# Altium PCB PCB2.PcbDoc
Units mm, origin at the board's own origin, x right, y up, seen from the top; angles counter-clockwise.
Board outline 69.72 x 73.53 mm, 2 copper layers (Top Layer, Bottom Layer); 25 components, 26 nets, 96 pads, 11 vias.
Unrouted connection lines stored in the file: 2.
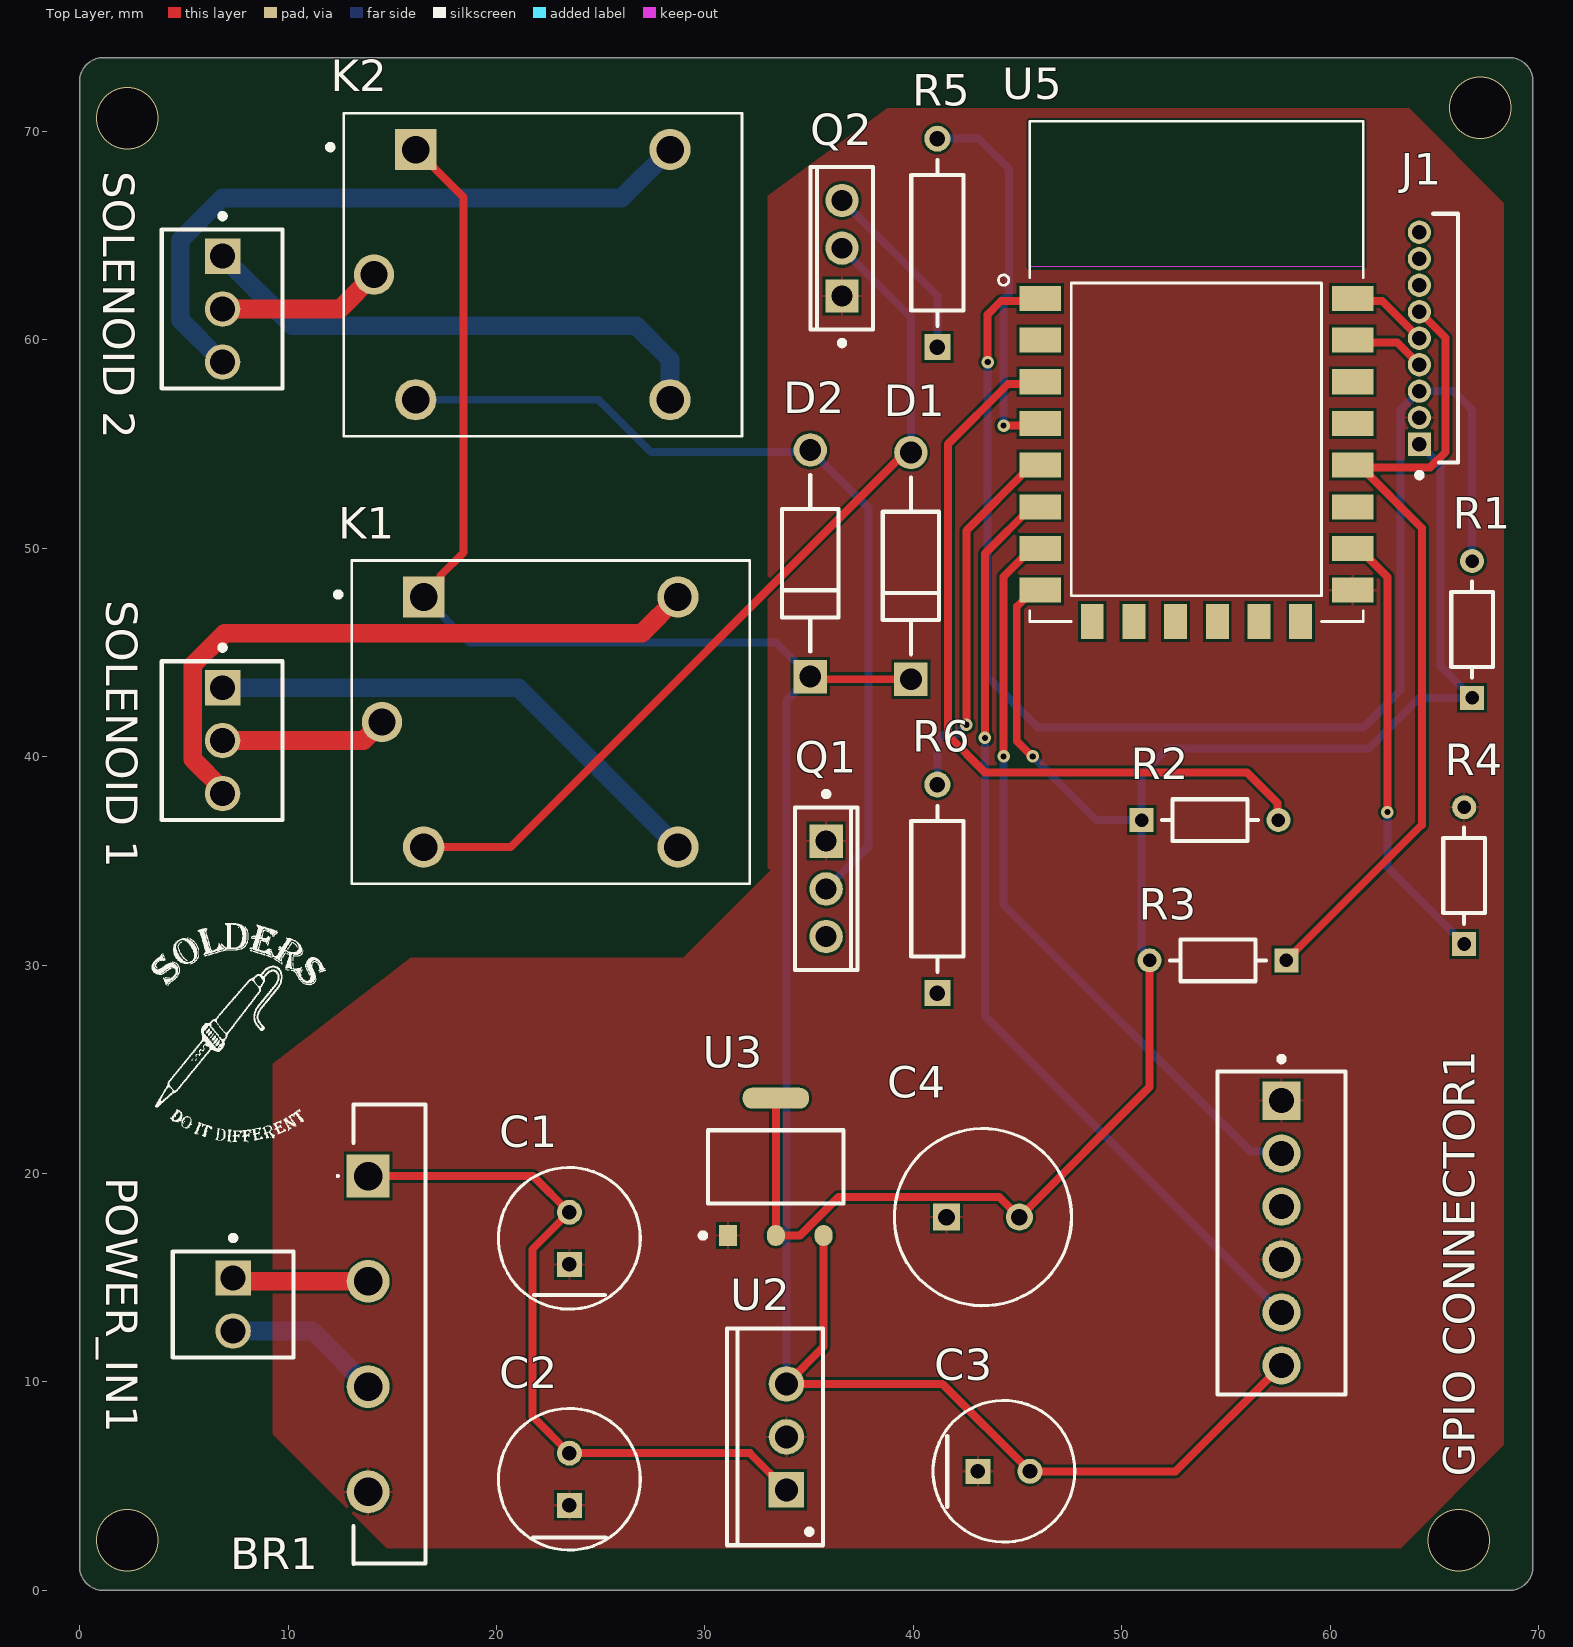
[diagram p0: Top Layer view]
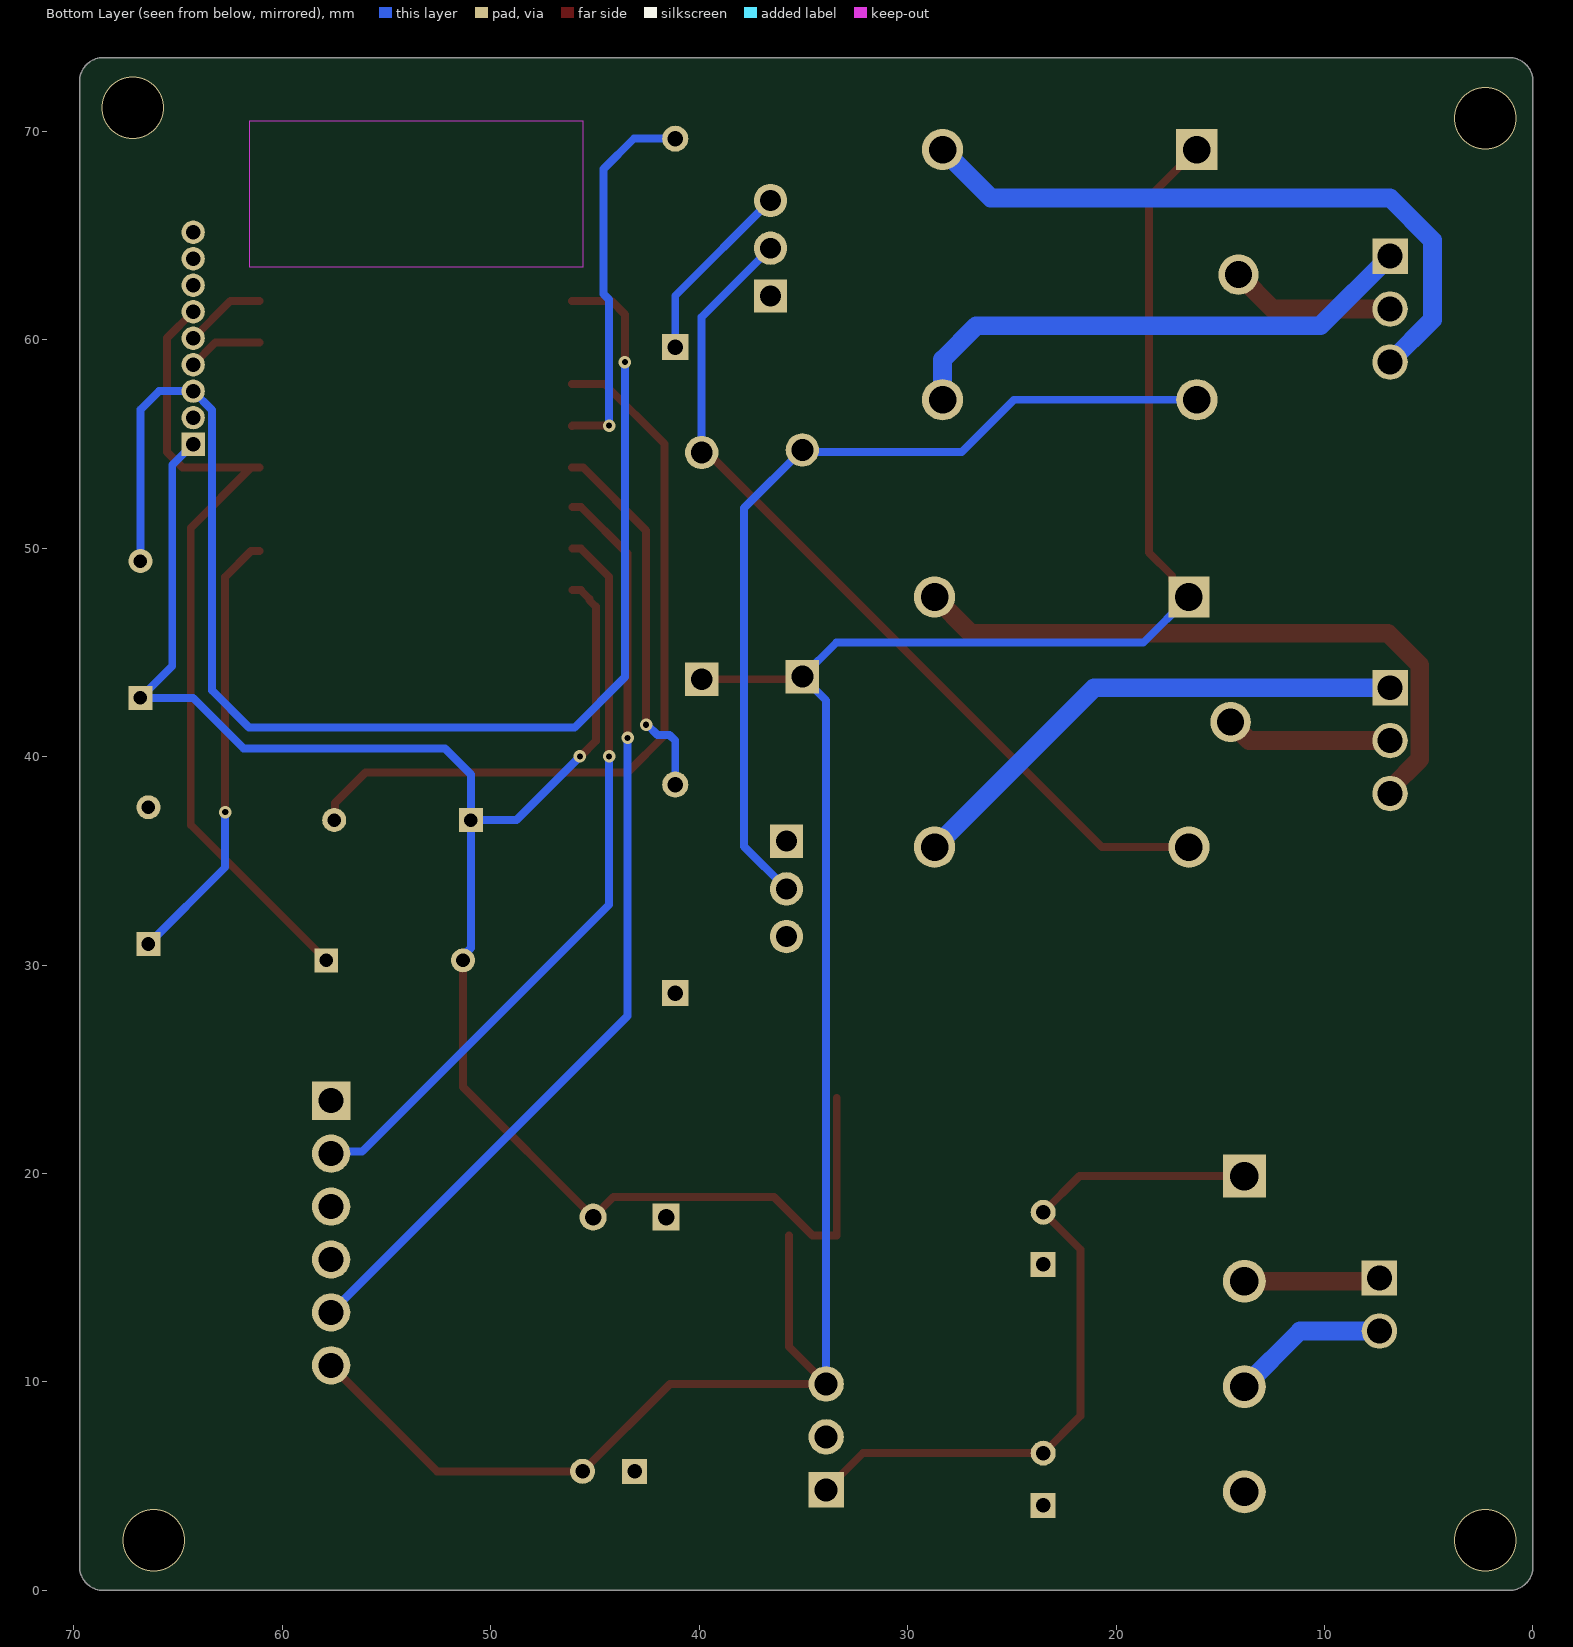
[diagram p1: Bottom Layer view, seen from below]
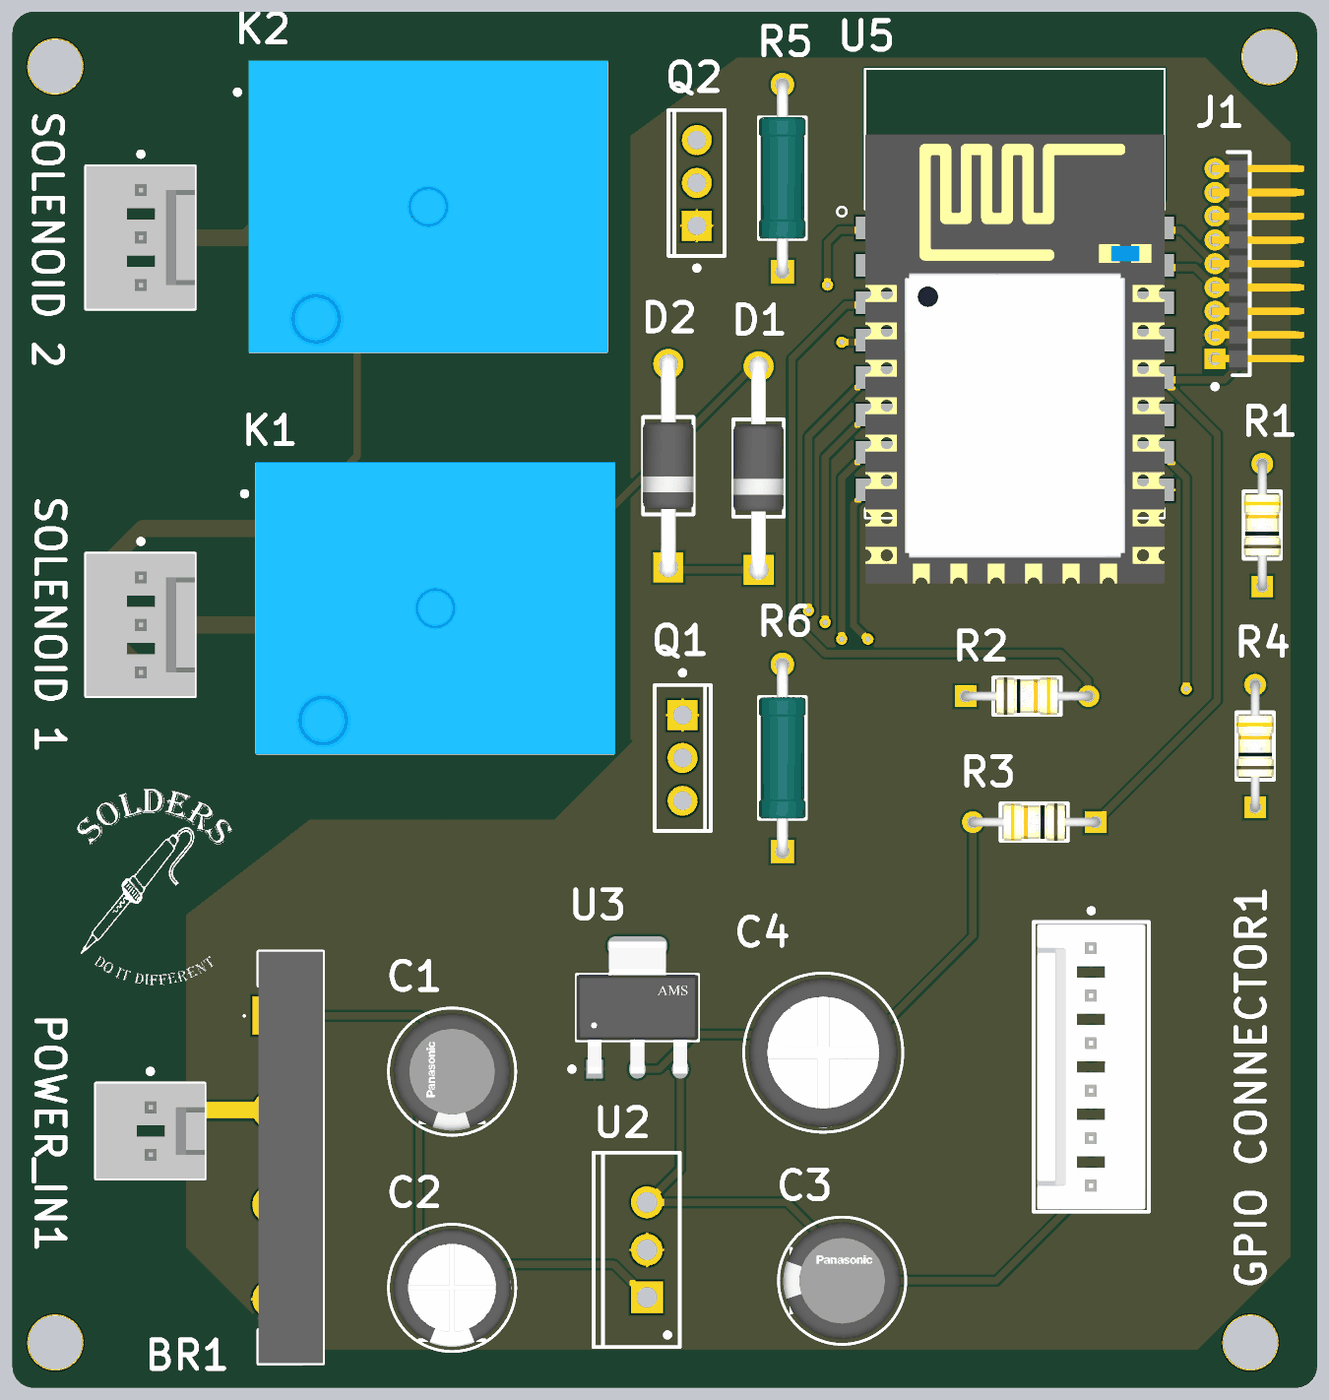
[diagram p2: 3D render of the assembled board from above, using the file's embedded part models]

## Layer stack, top to bottom
Top Solder: solder mask 0.0102, Solder Resist, Dk 3.5
Top Layer: signal copper 0.0356
Dielectric 1: dielectric 0.32, FR-4, Dk 4.8
Bottom Layer: signal copper 0.0356
Bottom Solder: solder mask 0.0102, Solder Resist, Dk 3.5

## Board outline
0,1.143 0,72.39 cw(c1.143,72.39) 1.143,73.533 68.58,73.533 cw(c68.58,72.39) 69.723,72.39 69.723,1.143 cw(c68.58,1.143) 68.58,0 1.143,0 cw(c1.143,1.143)

## Design rules (kind name [scope] priority, off if disabled: settings)
BoardOutlineClearance [All] p1: gap=0.2 ignorepadtopadclearanceinfootprint=FALSE
Clearance [All] p1: gap=0.127 ignorepadtopadclearanceinfootprint=FALSE except(0.25: Arc-Hole Track-Hole SMDPad-Hole THPad-Hole Via-Hole Fill-Hole Poly-Hole Region-Hole Text-Hole)
ComponentClearance [All] p1: gap=0.127 collisioncheckmode=3 verticalgap=0.127 showdistances=TRUE
DiffPairsRouting [All] p1: maxlimit=0.254 minlimit=0.127 mostfreqgap=0.127 toplayer_minwidth=0.127 toplayer_maxwidth=25.4 toplayer_prefwidth=0.127 bottomlayer_minwidth=0.127 bottomlayer_maxwidth=25.4 bottomlayer_prefwidth=0.127 maxuncoupledlength=12.7
Height [All] p1: minheight=0 maxheight=1816.048 prefheight=12.7
HoleSize [All] p1: absolutevalues=TRUE maxlimit=6.3 minlimit=0.3 maxpercent=80.000 minpercent=20.000
HoleToHoleClearance [All] p1: gap=0.25 allowstackedmicrovias=FALSE
MinimumAnnularRing [All] p1: minimumring=0.076
MinimumSolderMaskSliver [All] p1: minsoldermaskwidth=0
PlaneClearance [All] p1: clearance=0.127
PlaneConnect PlaneConnectPowerPads [InPadClass('PowerPads')] p1: planeconnectstyle=Direct reliefexpansion=0.508 reliefentries=4 reliefconductorwidth=0.254 reliefairgap=0.254
PlaneConnect [All] p2: pad.planeconnectstyle=Relief pad.reliefexpansion=0.3 pad.reliefentries=4 pad.reliefconductorwidth=0.127 pad.reliefairgap=0.127 via.planeconnectstyle=Direct via.reliefexpansion=0.3 via.reliefentries=4 via.reliefconductorwidth=0.127 via.reliefairgap=0.127
PolygonConnect PolygonConnectPowerPads [All vs (InPadClass('PowerPads'))] p1: connectstyle=Direct reliefconductorwidth=0.254 reliefentries=4 polygonreliefangle="90 Angle" airgapwidth=0.254
PolygonConnect [All] p2: thpad.connectstyle=Relief thpad.reliefconductorwidth=0.127 thpad.reliefentries=4 thpad.polygonreliefangle="90 Angle" thpad.airgapwidth=0.127 smdpad.connectstyle=Relief smdpad.reliefconductorwidth=0.127 smdpad.reliefentries=4 smdpad.polygonreliefangle="90 Angle" smdpad.airgapwidth=0.127 via.connectstyle=Direct via.reliefconductorwidth=0.127 via.reliefentries=4 via.polygonreliefangle="90 Angle" via.airgapwidth=0.127
RoutingVias [All] p1: holewidth=0.3 width=0.6 viastyle="Through Hole" minholewidth=0.3 minwidth=0.6 maxholewidth=0.6 maxwidth=6.6
SilkToSilkClearance [All] p1: silktosilkclearance=0
SilkToSolderMaskClearance [IsPad] p1: minsilkscreentomaskgap=0.127 clearancetoexposedcopper=TRUE
SolderMaskExpansion [All] p1: expansion=0.075 istentingtop=FALSE
Width [All] p1: maxlimit=25.4 minlimit=0.127 preferedwidth=0.127 minimp=50.000000 maximp=50.000000 favimp=50.000000
20 further rules are at their usual default settings.

## Components (designator, comment, footprint, x,y, rotation, side; value= is the part's Value field where it differs from the comment)
BR1 "GBU1510" GBU1510 13.843,19.879 r90 top
C1 "ECE-A1HN100U" FP-ECE-A1HN100U-MFG 23.495,16.891 r90 top
C2 "EEUFR1H470" FP-RAD-TH-D_6_3_0_5-L_11-MFG 23.495,5.334 r90 top
C3 "ECE-A1HN100U" FP-ECE-A1HN100U-MFG 44.343,5.715 r0 top
C4 "ECA1HEN220" FP-RAD-TH-D_8_0_5-L_11_5-MFG 43.335,17.907 r0 top
D1 "1N4007-E3/54" FP-1N4007-MFG 39.878,49.149 r90 top value=15pF
D2 "1N4007-E3/54" FP-1N4007-MFG 35.052,49.276 r90 top value=15pF
"GPIO CONNECTOR1" "22-27-2061" FP-22-27-2061-MFG 57.658,17.145 r270 top
J1 "GRPB091VWCN-RC" FP-GRPB091VWCN-RC-MFG 65.532,60.071 r90 top
K1 "SRD-05VDC-SL-C" RELAY_SRD-05VDC-SL-C 22.606,41.656 r0 top
K2 "SRD-05VDC-SL-C" RELAY_SRD-05VDC-SL-C 22.225,63.119 r0 top
POWER_IN1 "22-27-2021" MOLX-22-27-2021_V 7.366,13.716 r270 top
Q1 "BD139G" ONSC-TO-225-3-77-09 35.814,33.655 r0 top
Q2 "BD139G" ONSC-TO-225-3-77-09 36.576,64.389 r180 top
R1 "CF18JT10K0" FP-CF18-MFG 66.802,46.101 r90 top value=10kΩ
R2 "CF18JT10K0" FP-CF18-MFG 54.229,36.957 r0 top value=10kΩ
R3 "CF18JT10K0" FP-CF18-MFG 54.61,30.226 r180 top value=10kΩ
R4 "CF18JT10K0" FP-CF18-MFG 66.421,34.29 r90 top value=10kΩ
R5 "MRS25000C1001FCT00" FP-MRS25-MFG 41.148,64.643 r90 top
R6 "MRS25000C1001FCT00" FP-MRS25-MFG 41.148,33.655 r90 top
"SOLENOID 1" "22-27-2031" MOLX-22-27-2031_V 6.858,40.767 r270 top
"SOLENOID 2" "22-27-2031" MOLX-22-27-2031_V 6.858,61.468 r270 top
U2 "L7805CV" TO220 33.909,7.366 r90 top
U3 "AMS1117-3.3" FP-AMS1117-IPC_C 33.401,20.32 r90 top
U5 "ESP8266-12E/ESP-12E" XCVR_ESP8266-12E/ESP-12E 53.578,54.982 r0 top

## Footprints (in the part's own frame and the unit in brackets; to place one, negate y for a bottom-side part, rotate by r counter-clockwise, add the part's x,y. Pads: shape width x height; smd on the part's side, far side on the other; paste and mask are expansions set on the pad)
FP-1N4007-MFG [mm]
  rect 1.6x1.6 hole 1.05 paste-2539.97 mask+0: 1(-5.438,0)
  round 1.6 hole 1.05 paste-2539.97 mask+0: 2(5.438,0)
  silkscreen extent -4.24,-1.35 4.24,1.35, body extent -6.34,-1.45 6.34,1.45, height 0.25
FP-22-27-2061-MFG [mm]
  rect 1.84x1.84 hole 1.19 paste-2539.97 mask+0: 1(-6.35,0)
  round 1.84 hole 1.19 paste-2539.97 mask+0: 2(-3.81,0) 3(-1.27,0) 4(1.27,0) 5(3.81,0) 6(6.35,0)
  silkscreen extent -8.47,-3.08 7.75,3.08, body extent -7.85,-3.18 7.85,3.17, height 0.25
FP-AMS1117-IPC_C [mm]
  rect 1.004x0.872 smd paste+0 mask+0: 1(-3.295,2.29)
  rrect100% 1.004x0.872 smd paste+0 mask+0: 2(-3.295,0) 3(-3.295,-2.29)
  rrect87% 1.004x3.182 smd paste+0 mask+0: 4(3.295,0)
  silkscreen extent -3.42,-3.25 1.75,3.62, body extent -3.9,-3.35 3.9,3.35, height 0.25
FP-CF18-MFG [mm]
  rect 1.15x1.15 hole 0.65 paste-2539.97 mask+0: 1(-3.28,0)
  round 1.15 hole 0.65 paste-2539.97 mask+0: 2(3.28,0)
  silkscreen extent -2.3,-1 2.3,1, body extent -3.96,-1.1 3.96,1.1, height 0.25
FP-ECE-A1HN100U-MFG [mm]
  rect 1.2x1.2 hole 0.7 paste-2539.97 mask+0: 1(-1.25,0)
  round 1.2 hole 0.7 paste-2539.97 mask+0: 2(1.25,0)
  silkscreen extent -3.4,-3.4 3.4,3.4, body extent -3.5,-3.5 3.5,3.5, height 0.25
FP-GRPB091VWCN-RC-MFG [mm]
  rect 1.12x1.12 hole 0.7 paste-2539.97 mask+0: 1(-5.08,1.257)
  round 1.12 hole 0.7 paste-2539.97 mask+0: 2(-3.81,1.257) 3(-2.54,1.257) 4(-1.27,1.257) 5(0,1.257) 6(1.27,1.257) 7(2.54,1.257) 8(3.81,1.257) 9(5.08,1.257)
  silkscreen extent -6.69,-0.6 5.97,1.38, body extent -6.07,-3.9 6.07,1.92, height 0.25
FP-MRS25-MFG [mm]
  rect 1.25x1.25 hole 0.75 paste-2539.97 mask+0: 1(-5,0)
  round 1.25 hole 0.75 paste-2539.97 mask+0: 2(5,0)
  silkscreen extent -3.98,-1.25 3.98,1.25, body extent -5.72,-1.35 5.72,1.35, height 0.25
FP-RAD-TH-D_6_3_0_5-L_11-MFG [mm]
  rect 1.2x1.2 hole 0.7 paste-2539.97 mask+0: 1(-1.25,0)
  round 1.2 hole 0.7 paste-2539.97 mask+0: 2(1.25,0)
  silkscreen extent -3.4,-3.4 3.4,3.4, body extent -3.5,-3.5 3.5,3.5, height 0.25
FP-RAD-TH-D_8_0_5-L_11_5-MFG [mm]
  rect 1.3x1.3 hole 0.8 paste-2539.97 mask+0: 1(-1.75,0)
  round 1.3 hole 0.8 paste-2539.97 mask+0: 2(1.75,0)
  silkscreen extent -4.25,-4.25 4.25,4.25, body extent -4.35,-4.35 4.35,4.35, height 0.25
GBU1510 [mm]
  rect 2.055x2.055 hole 1.37: 1(0,0)
  round 2.055 hole 1.37: 2(-5.05,0) 3(-10.1,0) 4(-15.15,0)
  silkscreen extent -18.6,-2.76 3.42,1.5, body extent -18.57,-2.76 3.43,0.69, height 19.2
MOLX-22-27-2021_V [mm] "Header, 2-Leads, Body 5.8x5.08mm"
  rect 1.7x1.7 hole 1.19: 1(-1.27,0)
  round 1.7 hole 1.19: 2(1.27,0)
  silkscreen extent -3.31,-2.9 2.54,2.9, body extent -2.54,-2.9 2.54,2.9, height 11.72
MOLX-22-27-2031_V [mm] "Header, 3-Leads, Body 7.62x5.8mm, Pitch 2.54mm"
  rect 1.7x1.7 hole 1.19 paste-2539.97: 1(-2.54,0)
  round 1.7 hole 1.19 paste-2539.97: 2(0,0) 3(2.54,0)
  silkscreen extent -4.58,-2.92 3.81,2.88, body extent -3.81,-2.92 3.81,2.88, height 11.71
ONSC-TO-225-3-77-09 [mm] "FM, 3-Leads, Body 7.8x3mm, Pitch 2.29mm"
  rect 1.6x1.6 hole 1: 1(0,2.29)
  round 1.6 hole 1: 2(0,0) 3(0,-2.29)
  silkscreen extent -1.49,-3.9 1.51,4.67, body extent -1.49,-3.9 1.51,3.9, height 13.64
RELAY_SRD-05VDC-SL-C [mm]
  rect 1.98x1.98 / inner round 1.98 / far side rect 1.98x1.98 hole 1.32: A1(-6.1,6)
  round 1.98 hole 1.32: A2(-6.1,-6) NC(6.1,6) NO(6.1,-6)
  round 1.935 hole 1.29: COM(-8.1,0)
  silkscreen extent -10.3,-7.75 9.55,7.75, body extent -9.6,-7.8 9.6,7.8, height 15.8
TO220 [mm] "TO, Thru-Hole, Vertical, Heatsink Mounted; 3 In-Line Leads; Pitch 2.54 mm"
  rect 1.7x1.7 hole 1.1: 1(-2.54,0)
  round 1.7 hole 1.1: 2(0,0) 3(2.54,0)
  silkscreen extent -5.2,-1.75 5.2,2.85, body extent -5.25,-1.8 5.25,2.9, height 19.7
XCVR_ESP8266-12E/ESP-12E [mm]
  rect 2x1.2 smd: 1(-7.5,7) 2(-7.5,5) 3(-7.5,3) 4(-7.5,1) 5(-7.5,-1) 6(-7.5,-3) 7(-7.5,-5) 8(-7.5,-7) 15(7.5,-7) 16(7.5,-5) 17(7.5,-3) 18(7.5,-1) 19(7.5,1) 20(7.5,3) 21(7.5,5) 22(7.5,7)
  rect 1.1x1.7 smd: 9(-5,-8.5) 10(-3,-8.5) 11(-1,-8.5) 12(1,-8.5) 13(3,-8.5) 14(5,-8.5)
  Keep-Out Layer region: 8,8.51 -8.009,8.51 -8.009,15.5 8,15.5
  Keep-Out Layer region: 8,8.51 -8.009,8.51 -8.009,15.5 8,15.5
  silkscreen extent -9.5,-8.5 8,15.5, body extent -8,-12 8,12, height 3

## Part data
BR1: "Bridge Rectifier", Manufacturer_Name="HY Electronic", Datasheet Link=https://4donline.ihs.com/images/VipMasterIC/IC/HYEC/HYECS01082/HYECS01082-1.pdf?hkey=EF798316E3902B6ED9A73243A3159BB0, Height=19.1mm, Manufacturer_Part_Number=GBU1510
C1 C3: library part CMP-05427-000036-1, "CAP ALUM 10UF 20% 50V RADIAL", Capacitance=10uF, Case/Package=Radial, Dielectric Material=Aluminium, Leakage Current=4.5uA, Max Operating Temperature=85°C, Min Operating Temperature=-40°C, Package Quantity=200, Ripple Current=50mA, Tolerance=20%, Voltage=50V, Construction=RADIAL, Contact Plating=Tin, Diameter=6.3mm, Dissipation Factor=0.15%, Height=11.2mm, Height - Seated (Max)=0.441inch, Lead Diameter=0.5mm, Lead Free="Lead Free", Lead Pitch=2.5mm, Length=11.2mm, Life (Hours)=2000Hour, Mount="Through Hole", Number of Pins=2, Packaging=Bulk, Polarity=Bipolar, Radiation Hardening=No, REACH SVHC="No SVHC", Ripple Current (AC)=50mA, RoHS Compliant=Yes, Series=SU, Termination=Radial, Voltage Rating=50V, Voltage Rating (DC)=50V
C2: library part CMP-05427-001321-1, "Aluminum Electrolytic Capacitors (Radial Lead Type) 47uF ±20% 50V", Capacitance=47uF, Case/Package=Radial, Max Operating Temperature=105°C, Min Operating Temperature=-40°C, Ripple Current=405mA, Tolerance=20%, Voltage=50V, Construction=RADIAL, Diameter=6.3mm, Height=11.2mm, Impedance=140mR, Lead Diameter=0.5mm, Lead Pitch=2.5mm, Life (Hours)=5000Hour, Packaging=Bulk, REACH SVHC=Yes, Ripple Current (AC)=405mA, RoHS Compliant=Yes, Series="FR Radial", Termination=Radial, Voltage Rating=50V
C4: library part CMP-05427-001829-1, "Aluminum Electrolytic Capacitors (Radial Lead Type) 22uF ±20% 50V", Capacitance=22uF, Case/Package=Radial, Max Operating Temperature=105°C, Min Operating Temperature=-40°C, Package Quantity=200, Ripple Current=90mA, Tolerance=20%, Voltage Rating (DC)=50V, Lead Pitch=3.5mm, Lead/Base Style=Straight, Mount="Through Hole", Packaging=Bulk, Series=GA, Termination=Radial
D1 D2: library part CMP-02540-000046-1, "DIODE GEN PURP 1KV 1A DO204AL", Capacitance=15pF, Forward Current=1A, Manufacturer=Vishay, Max Junction Temp=+150°C, Max Repetitive Reverse Voltage=1000V, Max Surge Forward Current=30A, Package=1N4007, Peak Reverse Current=30uA, Temperature="-50°C to +150°C", Temperature Range Low=-50°C, Automotive=No, Category=Diode, ComponentLink2Description=Datasheet, ComponentLink2URL=http://www.vishay.com/docs/88503/1n4001.pdf, Device Class L1="Discrete Semiconductors", Device Class L2=Diodes, Device Class L3="Rectifier Diodes", Digikey Description="DIODE GEN PURP 1KV 1A DO204AL", Height=2.7mm, Ipc Land Pattern Name=DIOPA1088W105L520D270, Lead Free=Yes, Manufacturer Part Number=1N4007-E3/54, Mouser Description="Rectifiers Vr/1000V Io/1A", Octopart=https://octopart.com/1n4007-e3%2F54-vishay-39548207, RoHS=TRUE, Temperature Range High=+150°C
"GPIO CONNECTOR1": library part CMP-04776-000309-1, "CONN HEADER VERT 6POS 2.54MM", Color=Natural, Contact Resistance=10mR, Current Rating=4A, Flammability Rating="UL94 V-0", Housing Color=White, Max Operating Temperature=75°C, Max Voltage Rating (AC)=250V, Min Operating Temperature=0°C, Package Quantity=10000, Connector Type="Male Pin", Contact Material=Brass, Contact Mating Length=0.295inch, Contact Plating=Tin, Contact Type="Male Pin", Depth=5.8mm, Fastening Type=Friction, Gender=Male, Hole Diameter=1.02mm, Housing Material=Nylon, Lead Pitch=2.54mm, Length=15.24mm, Material=Nylon, Max Current Rating=4A, Mount="Through Hole", Number of Contacts=6, Number of Positions=6, Number of Rows=1, Orientation=Straight, Packaging=Bulk, Pitch=2.54mm, Radiation Hardening=No, REACH SVHC="No SVHC", Series=KK, Termination=Solder, Voltage Rating=250V, Voltage Rating (AC)=250V, Working Voltage=250V
J1: library part CMP-25680-000033-1, "CONN HEADER R/A 9POS 1.27MM", Package Quantity=1, Connector Type="Male Pin", Contact Mating Length=0.118inch, Contact Plating=Gold, Contact Type="Male Pin", Lead Free="Lead Free", Mount="Through Hole", Number of Positions=9, Number of Rows=1, Packaging=Bulk, Pitch=0.05inch, Termination=Solder
K1 K2: "5V Trigger Relay Module For Arduino And Raspberry Pi 5V Trigger Relay Module For Arduino And Raspberry Pi", Package="NON STANDARD-5 Songle Relay", Availability="Not in stock", Check_prices=https://www.snapeda.com/parts/SRD-05VDC-SL-C/Songle+Relay/view-part/?ref=eda, MF="Songle Relay", MP=SRD-05VDC-SL-C, Price=None, SnapEDA_Link=https://www.snapeda.com/parts/SRD-05VDC-SL-C/Songle+Relay/view-part/?ref=snap
POWER_IN1: library part CMP-2000-05537-1, "Male Header, Pitch 2.54 mm, 1 x 2 Position, Height 11.7 mm, Tail Length 3.56 mm, 0 to 75 degC, RoHS, Bulk", Current - Max=4A, Manufacturer=Molex, Operating temperature=0°Cto+75°C, Package Description="2-Leads Header, Body 5.08 x 5.8 mm, Pitch 2.54 mm", Package Version="Rev. BC, 02/2012", PartNumber=0022272021, Voltage - Max=250V, Contact Material=Tinplatedbrass, Current Rating=4A, Datasheet URL=http://www.molex.com/pdm_docs/sd/022272021_sd.pdf, Datasheet Version="Rev. F, 06/2009", Housing Material=Nylon(UL94V-0), Manufacturer URL=http://www.molex.com/, Mounting Technology=ThroughHole, No. of Positions=2, No. of Rows=1, Orientation=Vertical, Package Reference=22-27-2021, Pitch=2.54mm, Voltage Rating=250V
Q1 Q2: library part CMP-1048-01269-1, "Plastic Medium-Power Silicon NPN Transistor, 3-Pin TO-225, Pb-Free, Bulk Box", Manufacturer="On Semiconductor", ComponentLink1Description="Manufacturer URL", ComponentLink1URL=http://www.onsemi.com/, ComponentLink2Description=Datasheet, ComponentLink2URL=http://www.onsemi.com/pub_link/Collateral/BD135-D.PDF, ComponentLink3Description="Package Specification", ComponentLink3URL=http://www.onsemi.com/pub_link/Collateral/77-09.PDF, DatasheetVersion="Rev. 16", IC Continuous (A)=1.5, Mounting Technology="Through Hole", PackageDescription="3-Pin Flange Mount, Vertical Straight Lead, Body 7.6 x 2.7 mm, Pitch 2.29 mm", PackageReference=TO-225-3-77-09, PackageVersion="Rev. AC, 12/2013", Packing="Bulk Box", PartNumber=BD139G, Polarity=NPN, RoHS=TRUE
R1 R2 R3 R4: library part CMP-26528-000002-1, "RES 10K OHM 1/8W 5% CF AXIAL", Manufacturer="Stackpole Electronics", Package=CF18, Power Rating=0.125W, Resistance=10kΩ, Temperature="-55°C to +155°C", Temperature Coefficient=0-500ppm/°C, Temperature Range High=+155°C, Temperature Range Low=-55°C, Tolerance=5%, Voltage Rating=250V, Automotive=No, Category=Res, ComponentLink2Description=Datasheet, ComponentLink2URL=http://www.seielect.com/Catalog/SEI-CF_CFM.pdf, Composition="Carbon Film", Device Class L1="Passive Components", Device Class L2=Resistors, Device Class L3="Through-Hole Resistors", Digikey Description="RES 10K OHM 1/8W 5% CF AXIAL", Height=2mm, Ipc Land Pattern Name=RESAD656W65L360D200, Lead Free=Yes, Manufacturer Part Number=CF18JT10K0, Octopart=https://octopart.com/cf18jt10k0-stackpole+electronics-19205642, RoHS=TRUE, Series=CF
R5 R6: library part CMP-02408-000051-1, "RES 1K OHM 0.6W 1% AXIAL", Case/Package=Axial, Max Operating Temperature=155°C, Max Power Dissipation=600mW, Min Operating Temperature=-55°C, Package Quantity=5000, Resistance=1kR, Resistance Tolerance=1%, Resistor Type="Metal Film", Temperature Coefficient=50ppm/°C, Voltage Rating=350V, Construction=Cylindrical, Contact Plating=Tin, Diameter=2.5mm, Lead Diameter=0.6mm, Lead Free="Lead Free", Length=6.5mm, Military Standard=Not, Mount="Through Hole", Number of Pins=2, Number of Terminations=2, Packaging="Tape and Reel", Power Rating=600mW, Radiation Hardening=No, RoHS Compliant=Yes, Series=MRS25, Technology="THIN FILM", Termination=Axial, Tolerance=1%, Voltage Rating (DC)=350V, Weight=0.00776oz, Width=2.5mm
"SOLENOID 1" "SOLENOID 2": library part CMP-2000-05538-1, "Male Header, Pitch 2.54 mm, 1 x 3 Position, Height 11.7 mm, Tail Length 3.56 mm, -40 to 80 degC, RoHS, Bulk", Current Rating=4A, Manufacturer=Molex, Operating temperature=0°Cto+75°C, Package Description="Male Header, Pitch 2.54 mm, 1 x 3 Position, Height 11.7 mm, Tail Length 3.56 mm", Voltage Rating=250V, Contact Material=Tinplatedbrass, Datasheet URL=http://www.molex.com/webdocs/datasheets/pdf/en-us/0022272031_PCB_HEADERS.pdf, Datasheet Version=06/2016, Housing Material=Nylon(UL94V-0), Manufacturer URL=http://www.molex.com/, Mounting Technology=ThroughHole, Package Reference=22-27-2031, Package URL=http://www.molex.com/pdm_docs/sd/022272031_sd.pdf
U2: library part CMP-0244-00483-1, "Positive Voltage Regulator, 5V, 3-Pin TO-220", ComponentLink1Description="Manufacturer URL", ComponentLink1URL=http://www.st.com, ComponentLink2Description=Datasheet, ComponentLink2URL=http://www.st.com/internet/com/TECHNICAL_RESOURCES/TECHNICAL_LITERATURE/DATASHEET/CD00000444.pdf, ComponentLink3Description="Package Specification", ComponentLink3URL=http://www.st.com/internet/com/TECHNICAL_RESOURCES/TECHNICAL_LITERATURE/PACKAGE_INFORMATION/CD00004649.pdf, DatasheetVersion=16/11/2011, PackageDescription="TO, Thru-Hole, Vertical, Heatsink Mounted; 3 In-Line Leads; Pitch 2.54 mm", PackageReference=TO220, PackageVersion=ver3.0
U3: library part CMP-209535-000001-1, "LDO Voltage Regulators 1A, 3.3V", Dropout Voltage=1.1V, Manufacturer="Advanced Monolithic Systems", Max Junction Temp=+125°C, Max Power Dissipation=1.2W, Max Supply Voltage=15V, Nominal Supply Current=5mA, Output Current=1A, Output Voltage=3.3V, Package=AMS1117, Temperature="-40°C to +125°C", Temperature Range Low=-40°C, Automotive=No, Category=IC, ComponentLink2Description=Datasheet, ComponentLink2URL=http://www.advanced-monolithic.com/pdf/ds1117.pdf, Device Class L1="Integrated Circuits (ICs)", Device Class L2="Power Management ICs", Device Class L3="Voltage Regulators - Linear", Height=1.8mm, Ipc Land Pattern Name=SOT229P700X180-4, Lead Free=Yes, Manufacturer Part Number=AMS1117-3.3, Number Of Outputs=1, Octopart=https://octopart.com/ams1117-3.3-advanced+monolithic+systems-25899300, Output Type=Fixed, RoHS=TRUE, Standoff Height=0.64mm, Temperature Range High=+125°C
U5: "This WiFi module has a 32-bit MCU micro and clock speeds supporting 80 MHz or 160 MHz. Supports the RTOS and integrated Wi-Fi MAC/BB/RF/PA/LNA, and has an on-board antenna.", Package=None, Availability="Not in stock", Check_prices=https://www.snapeda.com/parts/ESP8266-12E/ESP-12E/AI-Thinker/view-part/?ref=eda, MF=AI-Thinker, MP=ESP8266-12E/ESP-12E, Price=None, SnapEDA_Link=https://www.snapeda.com/parts/ESP8266-12E/ESP-12E/AI-Thinker/view-part/?ref=snap

## Via types
v1: diameter 0.6, hole 0.3, Top Layer to Bottom Layer, 7 vias
v2: diameter 3, hole 2.9, Top Layer to Bottom Layer, 3 vias
v3: diameter 3/3 (per signal layer), hole 2.9, Top Layer to Bottom Layer, 1 vias

## Nets (pads, with @x,y where several pads share a name; then routed paths per layer and width w, separated by ;. In a path a pad name is that pad's centre, name@x,y a point inside that pad or via, vN(x,y) a via of type N, cw(c..) or ccw(c..) an arc to the next point about the centre after c; other vN are vias at no path point)
3.3V: C4.2 J1.1 R1.1 R2.1 R3.2 U3.2 U3.4 U5.8 | length 89.5
  Top Layer w0.381: U3.4 U3.2 34.559,17.025 36.409,18.875 44.117,18.875 C4.2 51.33,24.152 R3.2 ; v1(45.72,40.005) 45.698,40.005 44.958,40.745 44.958,47.191 45.268,47.502 45.268,47.572 45.678,47.982 U5.8
  Bottom Layer w0.381: v1(45.72,40.005) 48.768,36.957 R2.1 ; R3.2 51.33,30.434 50.949,30.815 R2.1 ; J1.1 65.278,53.988 65.278,44.345 R1.1 64.284,42.821 61.849,40.386 52.197,40.386 50.949,39.138 R2.1
+5: "GPIO CONNECTOR1.3" "GPIO CONNECTOR1.6" C3.2 D1.1 D2.1 K1.A1 K2.A1 U2.3 U3.3 | length 118.1
  Top Layer w0.381: K2.A1 18.415,66.829 18.415,49.784 17.306,48.675 17.306,48.456 K1.A1 ; D2.1 35.179,43.711 D1.1 ; U3.3 35.691,11.688 U2.3 41.402,9.906 C3.2 52.578,5.715 57.658,10.795
  Bottom Layer w0.381: K1.A1 18.696,45.466 33.424,45.466 D2.1 33.909,42.695 U2.3
ac1: BR1.2 POWER_IN1.1 | length 6.5
  Top Layer w0.381: POWER_IN1.1 POWER_IN1.1@7.523,14.829
  Top Layer w0.9: POWER_IN1.1@7.523,14.829 BR1.2
ac2: BR1.3 POWER_IN1.2 | length 7.6
  Bottom Layer w0.9: POWER_IN1.2 11.176,12.446 BR1.3
GND: "GPIO CONNECTOR1.1" "GPIO CONNECTOR1.4" BR1.4 C1.1 C2.1 C3.1 C4.1 J1.2 Q1.1 Q2.1 R4.2 U2.2 U3.1 U5.15
IO0: J1.6 R3.1 U5.18 | length 39.5
  Top Layer w0.381: R3.1 64.389,36.725 64.389,50.969 U5.18@61.494,53.864 ; U5.18@61.094,53.864 U5.18@61.494,53.864 ; J1.6 65.532,60.084 65.532,54.61 64.786,53.864 U5.18@61.494,53.864
IO12: "GPIO CONNECTOR1.5" U5.6 | length 45.9
  Top Layer w0.381: v1(43.434,40.894) 43.434,49.738 45.678,51.982 U5.6
  Bottom Layer w0.381: v1(43.434,40.894) 43.434,27.559 57.658,13.335
IO13: "GPIO CONNECTOR1.2" U5.7 | length 36.3
  Top Layer w0.381: v1(44.323,40.005) 44.323,48.627 45.678,49.982 U5.7
  Bottom Layer w0.381: v1(44.323,40.005) 44.323,32.893 56.166,21.05 57.563,21.05 57.658,20.955
IO14: R6.2 U5.5 | length 17.9
  Top Layer w0.381: v1(42.545,41.529) 42.545,50.849 45.56,53.864 U5.5@46.094,53.864
  Bottom Layer w0.381: R6.2 41.148,40.767 41.417,41.036 41.993,41.036 42.486,41.529 v1(42.545,41.529)
IO16: R5.2 U5.4 | length 18.2
  Top Layer w0.381: v1(44.323,55.88) 46.078,55.88 U5.4@46.094,55.864
  Bottom Layer w0.381: R5.2 43.133,69.643 44.593,68.183 44.593,62.196 44.323,61.926 v1(44.323,55.88)
NetBR1_1: BR1.1 C1.2 C2.2 U2.1 | length 34.5
  Top Layer w0.381: BR1.1 21.757,19.879 C1.2 21.717,16.363 21.717,8.362 C2.2 32.151,6.584 U2.1
NetD1_2: D1.2 K1.A2 Q2.2 | length 42.4
  Top Layer w0.381: K1.A2 20.67,35.656 39.601,54.587 D1.2
  Bottom Layer w0.381: Q2.2 39.878,61.087 D1.2
NetD2_2: D2.2 K2.A2 Q1.2 | length 43
  Bottom Layer w0.381: K2.A2 24.893,57.119 27.402,54.61 D2.2@35.052,54.61 ; D2.2 37.846,51.92 37.846,35.687 Q1.2
NetK1_COM: "SOLENOID 1.2" K1.COM | length 8
  Top Layer w0.9: 6.858,40.767 13.617,40.767 K1.COM
NetK1_NC: "SOLENOID 1.3" K1.NC | length 31.4
  Top Layer w0.9: 6.858,38.227 6.858,38.443 5.431,39.87 5.431,44.396 6.958,45.923 26.973,45.923 K1.NC
NetK1_NO: "SOLENOID 1.1" K1.NO | length 25
  Bottom Layer w0.9: 6.858,43.307 21.055,43.307 K1.NO
NetK2_COM: "SOLENOID 2.2" K2.COM | length 8
  Top Layer w0.9: 6.858,61.468 12.474,61.468 K2.COM
NetK2_NC: "SOLENOID 2.3" K2.NC | length 32
  Bottom Layer w0.9: 6.858,58.928 4.826,60.96 4.826,64.77 6.858,66.802 26.008,66.802 K2.NC
NetK2_NO: "SOLENOID 2.1" K2.NO | length 25.5
  Bottom Layer w0.9: 6.858,64.008 10.199,60.667 26.709,60.667 28.325,59.051 K2.NO
NetQ1_3: Q1.3 R6.1
NetQ2_3: Q2.3 R5.1 | length 8.9
  Bottom Layer w0.381: Q2.3 41.148,62.107 R5.1
NetR2_2: R2.2 U5.3 | length 37.6
  Top Layer w0.381: U5.3@46.094,57.864 44.529,57.864 41.656,54.991 41.656,41.021 43.434,39.243 56.007,39.243 57.471,37.779 57.471,36.995 R2.2
NetR4_1: R4.1 U5.16 | length 21.3
  Top Layer w0.381: U5.16@61.094,49.864 61.494,49.864 62.738,48.62 v1(62.738,37.338)
  Bottom Layer w0.381: v1(62.738,37.338) 62.738,34.693 R4.1
RESET: J1.3 R1.2 U5.1 | length 66.6
  Top Layer w0.381: v1(43.561,58.928) 43.561,61.214 44.211,61.864 U5.1@46.094,61.864
  Bottom Layer w0.381: v1(43.561,58.928) 43.561,43.815 45.974,41.402 61.595,41.402 63.373,43.18 63.373,56.629 J1.3 65.913,57.531 66.802,56.642 R1.2
RX: J1.4 U5.21 | length 3.6
  Top Layer w0.381: U5.21@61.094,59.864 63.212,59.864 J1.4
TX: J1.5 U5.22 | length 3.9
  Top Layer w0.381: U5.22@61.094,61.864 62.482,61.864 J1.5
pads on no net: J1.7 J1.8 J1.9 U5.2 U5.9 U5.10 U5.11 U5.12 U5.13 U5.14 U5.17 U5.19 U5.20
copper on no net:
  other v2: 2.286,2.413 66.167,2.413 67.183,71.12
  other v3: 2.286,70.612

## Polygon pours and split planes (outlines as drawn)
GND on Top Layer "GND_L01_P001" (solid, remove dead copper, pour order 1): 33.02,66.902 38.735,71.093 63.781,71.093 68.326,66.548 68.326,6.985 63.373,2.032 14.732,2.032 9.271,7.493 9.271,25.273 15.875,30.353 28.956,30.353 33.147,34.544 33.02,34.671 33.02,66.167

## Silkscreen, mask and mechanical layers (free items; w line width, h text height)
Top Overlay:
  drawing of 254 lines, arcs and shapes, not listed
Mechanical 1:
  lines w0.254: 0,1.143 ccw(c1.143,1.143) 1.143,0 68.58,0 ccw(c68.58,1.143) 69.723,1.143 69.723,72.39 ccw(c68.58,72.39) 68.58,73.533 1.143,73.533 ccw(c1.143,72.39) 0,72.39 0,66.929 0,1.143